# EAGLE board codeLock (EAGLE 7.7.0)
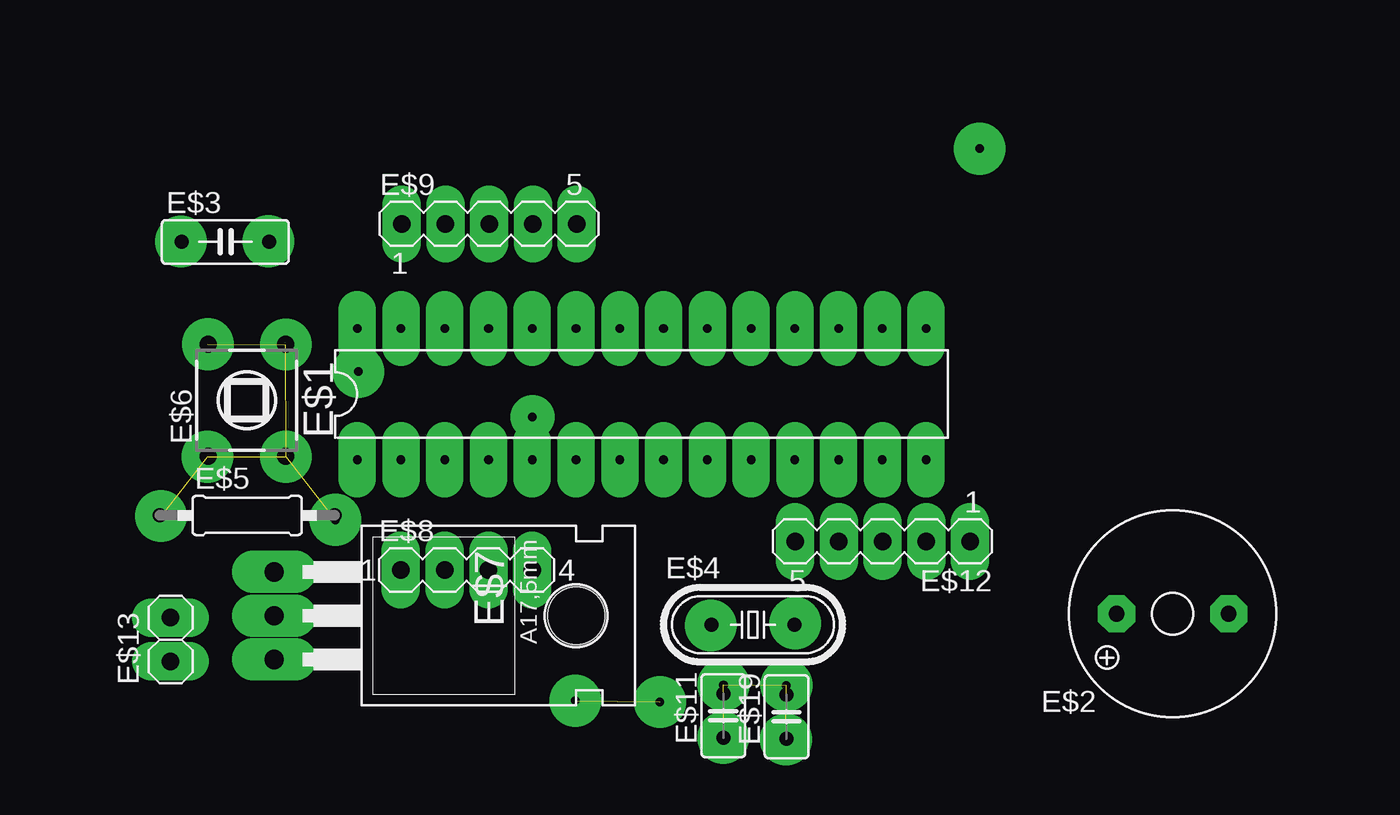
[diagram p0: board, top side]
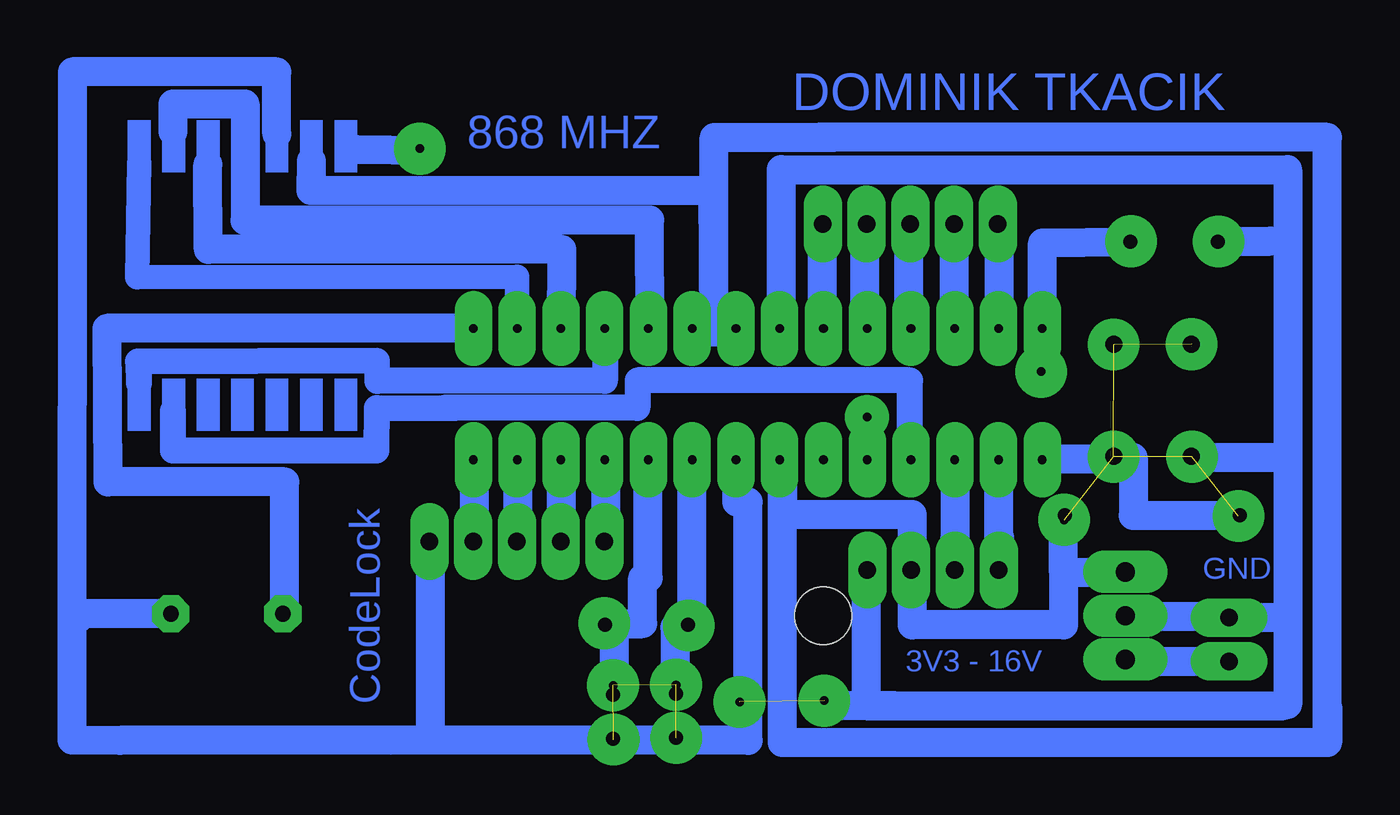
[diagram p1: board, bottom side, seen from below]

No outline drawn. Coordinates in mm, seen from the top.
Copper layers (1*16): Top 0.035mm / dielectric 1.5mm / Bottom 0.035mm
Design rules "default *": minimum track width 10mil, minimum drill 24mil, track to track 8mil, track to pad 8mil, pad to pad 8mil, via to via 8mil, smd to smd 8mil, copper to edge 40mil, drill to drill 8mil, minimum pad ring 10mil, minimum via ring 8mil, stop-mask expansion 4mil, vias tented up to drill 0mil, thermal gap 10mil

## Footprints (pad centres in the part's own frame; a part is rotated, then mirrored left to right if it is on the bottom)
DIL28-3 = drill 0.5 pad 2.184 long: 1 -16.51,-3.81; 2 -13.97,-3.81; 3 -11.43,-3.81; 4 -8.89,-3.81; 5 -6.35,-3.81; 6 -3.81,-3.81; 7 -1.27,-3.81; 8 1.27,-3.81; 9 3.81,-3.81; 10 6.35,-3.81; 11 8.89,-3.81; 12 11.43,-3.81; 13 13.97,-3.81; 14 16.51,-3.81; 15 16.51,3.81; 16 13.97,3.81; 17 11.43,3.81; 18 8.89,3.81; 19 6.35,3.81; 20 3.81,3.81; 21 1.27,3.81; 22 -1.27,3.81; 23 -3.81,3.81; 24 -6.35,3.81; 25 -8.89,3.81; 26 -11.43,3.81; 27 -13.97,3.81; 28 -16.51,3.81
F/QMBIII = drill 0.914 pad 2.159 octagon: + 3.251,0; - -3.251,0
C050-025X075 = drill 0.813 octagon: 1 -2.54,0; 2 2.54,0
HC49/S = drill 0.813: 1 -2.413,0; 2 2.413,0
0207/10 = drill 0.813 octagon: 1 -5.08,0; 2 5.08,0
TL1105T = drill 1 pad 1.676: 1 -2.25,3.25; 2 2.25,3.25; 3 -2.25,-3.25; 4 2.25,-3.25
TO220 = drill 1.118 long: 1 -2.54,-6.35; 2 0,-6.35; 3 2.54,-6.35 | hole 3.302: 0,11.176
MA04-1 = drill 1.016 long: 1 -3.81,0; 2 -1.27,0; 3 1.27,0; 4 3.81,0
MA05-1 = drill 1.016 long: 1 -5.08,0; 2 -2.54,0; 3 0,0; 4 2.54,0; 5 5.08,0
C2.5-2 = drill 0.813 pad 1.6 octagon: 1 -1.27,0; 2 1.27,0
1X02 = drill 1.016 long: 1 -1.27,0; 2 1.27,0

## Placement (x,y rotation side)
E$1  [DIL28-3]  59.75,65.13 0 top
E$2  [F/QMBIII]  90.57,52.38 180 top
E$3  [C050-025X075]  35.58,73.96 0 top
E$4  [HC49/S]  66.21,51.75 0 top
E$5  [0207/10]  36.85,58.09 0 top
E$6  [TL1105T]  36.83,64.77 0 top
E$7  [TO220]  44.77,52.27 270 top
E$8  [MA04-1]  49.58,54.92 0 top
E$9  [MA05-1]  50.9,75.01 0 top
E$11  [C2.5-2]  64.49,46.47 90 top
E$12  [MA05-1]  73.73,56.59 180 top
E$13  [1X02]  32.41,50.89 90 top
E$19  [C2.5-2]  68.16,46.41 90 top

## Library data of the parts
E$1 = atmega328L
E$2 = buzzer
E$3 = rcl
E$4 = crystal
E$5 = resistor
E$6 = switch
E$7 = transistor-pnp
E$8 E$9 E$12 = con-lstb
E$11 E$19 = capacitor-wima
E$13 = pinhead

## Nets
S$49: E$1.11

## Tracks (layer width: path | path; a pad name or v marks a point on that pad's centre or on a via)
S$1  (via drill 0.5 pad 3)
  other vias: 68.66,51.83
S$2
  Bottom 1.676: 63.52,61.3 63.59,61.3 63.59,51.58 64.56,51.58 64.56,48.13
S$3
  Bottom 1.676: 26.68,47.01 26.68,44.9 58.32,44.9 58.32,59.47
S$4
  Bottom 1.676: 45.71,56.8 45.75,56.8 45.75,61.53
S$5
  Bottom 1.676: 48.28,61.13 48.32,61.13 48.32,56.72
S$6
  Bottom 1.676: 38.72,54.75 42,54.75 | 42,54.75 42,58.08 | 58.33,61.14 58.33,58.15 50.8,58.15 50.8,51.74 42,51.74 42,54.75
S$7
  Bottom 1.676: 37.96,61.44 37.96,58.09 32.68,58.09
S$8
  Bottom 1.676: 53.46,55.01 53.46,47.06 29.22,47.06
S$9
  Bottom 1.676: 32.38,52.22 39.31,52.22 37.31,52.16
S$10
  Bottom 1.676: 32.38,49.61 39.02,49.61 37.02,49.67
S$11
  Bottom 1.676: 62.28,68.73 62.28,80.03 55.37,80.03
S$12
  Bottom 1.676: 62.29,69.14 62.35,76.93 85.68,76.93 85.66,78.65
S$13  (via drill 0.5 pad 3)  (5 unrouted)
  other vias: 34.57,68.02 39.09,68 41.97,57.84 39.1,61.49 34.55,61.5 31.85,58.05 38.09,74 33,73.98
S$14
  Bottom 1.676: 55.89,47.36 55.6,47.07 51.87,47.07
S$15
  Bottom 1.422: 60.9,68.59 63.53,68.59
S$16
  Bottom 0.406: 60.97,68.86 60.84,68.86
S$17
  Bottom 1.5: 93.7,64.16 93.7,61.87 81.89,61.87 81.86,64.32 77.35,64.33
S$18
  Bottom 1.5: 68.63,68.73 68.63,65.9 81.82,65.89 81.86,67.05 95.72,67.01 95.68,65.77
S$19
  Bottom 1.422: 73.71,68.7 73.72,71.93 95.76,71.9 95.67,78.54
S$20
  Bottom 1.676: 60.83,47.26 arc-90 60.33,47.76 60.33,51.45
S$21
  Bottom 1.676: 71.14,68.79 71.12,73.52 91.65,73.52 91.67,78.44
S$22
  Bottom 1.422: 60.32,58.87 60.97,58.87
  Bottom 1.676: 60.32,58.87 60.32,45.04 96.76,45.04 | 60.97,58.87 60.97,60.95
S$23
  Bottom 1.676: 93.69,80.38 93.69,81.97 89.52,81.97 89.52,75.19
S$24
  Bottom 1.676: 66.02,68.72 66.03,75.22 89.47,75.22
S$25
  Bottom 1.676: 76.2,68.94 97.53,68.94 97.47,60.04 87.21,60.04 87.21,52.33
S$26
  Bottom 1.676: 83.18,79.35 78.9,79.29
S$27
  Bottom 1.676: 45.83,74.78 45.77,74.78 45.77,68.65
S$28  (via drill 0.5 pad 3)  (1 unrouted)
  other vias: 60.81,47.27 55.89,47.34
S$29  (via drill 0.5 pad 3)
  other vias: 63.75,51.7
S$30  (via drill 0.5 pad 3)  (3 unrouted)
  other vias: 68.15,48.23 64.5,48.26 64.49,45.19 68.13,45.08
S$31
  Bottom 1.676: 68.66,51.81 66.44,51.81 66.44,54.46 66.11,54.46 66.11,60.94
S$32
  Bottom 1.676: 87.67,80.23 87.67,83.82 99.54,83.82 99.56,45.06 81.06,45.05
S$33
  Bottom 1.676: 78.78,57.71 78.78,45.05
S$34
  Bottom 1.676: 48.3,68.82 48.35,68.82 48.35,75.01
S$35
  Bottom 1.676: 32.37,52.17 29.05,52.17 29.05,52.23
S$36  (via drill 0.5 pad 3)
  other vias: 79.36,79.37
S$37
  Bottom 1.5: 50.92,61.26 50.92,65.93 66.73,65.93 66.74,64.33 77.98,64.33
S$38
  Bottom 1.676: 29,47.11 29,78.15 58.39,78.15 58.39,68.55
S$39
  Bottom 1.676: 33.56,61.47 29.23,61.47
S$40
  Bottom 1.676: 50.88,68.88 50.99,68.88 50.99,74.95
S$41
  Bottom 1.676: 53.46,68.88 53.52,68.88 53.52,75.01
S$42
  Bottom 1.676: 55.93,68.82 55.99,68.82 55.99,75.01
S$43  (via drill 0.5 pad 2.54)
  other vias: 53.41,63.8
S$44
  Bottom 1.676: 26.69,45.59 26.69,80.02 56.25,80.03
S$45  (via drill 0.5 pad 3)
  other vias: 43.3,66.43
S$46
  Bottom 1.676: 43.33,66.43 43.22,66.38 43.22,73.91 38.27,73.96
S$47
  Bottom 1.676: 33,74 30,74
S$48
  Bottom 1.676: 68.69,51.9 68.1,51.9 68.1,48.06
S$49
  Bottom 1.676: E$1.11 68.6,61.32 68.6,56.73
S$50
  Bottom 1.676: 71.22,61.3 71.16,61.3 71.16,56.79
S$51
  Bottom 1.676: 73.73,61.35 73.69,61.35 73.69,56.79
S$52
  Bottom 1.676: 76.28,61.33 76.22,61.33 76.22,56.73
S$53
  Bottom 1.676: 93.84,52.38 99.14,52.38 99.14,52.13
S$54
  Bottom 1.676: 43.18,61.38 37.99,61.39
(copper drawn outside any net)
  shapes: Bottom area x13

## Text on the board
Bottom: DOMINIK TKACIK | 868 MHZ | CodeLock | GND | 3V3 - 16V